# EAGLE board IOT_PCB (EAGLE 9.6.2)
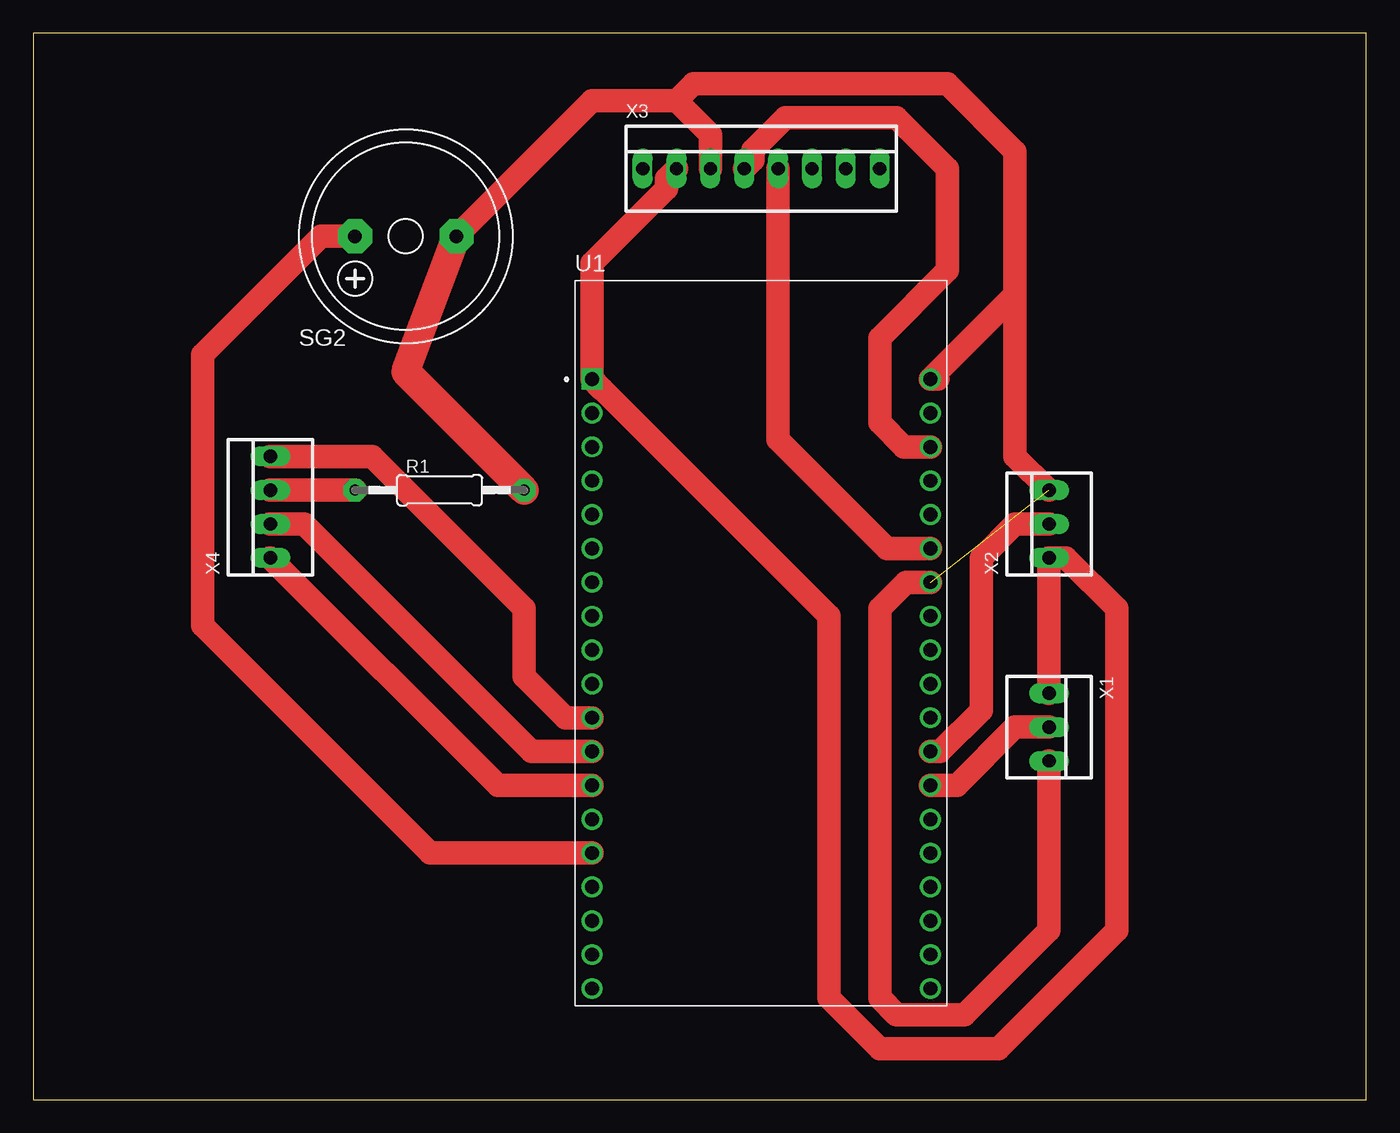
[diagram p0: board, top side]

Size 100 x 80 mm. Coordinates in mm from the lower left corner, seen from the top.
Outline: 0,0 100,0 100,80 0,80 0,0
Copper layers (1*16): Top 0.035mm / dielectric 1.5mm / Bottom 0.035mm
Design rules "default *": minimum track width 20mil, minimum drill 0.35mm, track to track 40mil, track to pad 25mil, pad to pad 6mil, via to via 6mil, smd to smd 6mil, copper to edge 40mil, drill to drill 6mil, minimum pad ring 10mil, minimum via ring 8mil, stop-mask expansion 4mil, vias tented up to drill 0mil, thermal gap 10mil

## Footprints (pad centres in the part's own frame; a part is rotated, then mirrored left to right if it is on the bottom)
0207/12 = drill 0.813 pad 1.676 octagon: 1 -6.35,0; 2 6.35,0
F/HMB = drill 1.016 pad 2.54 octagon: + 3.81,0; - -3.81,0
MODULE_ESP32-DEVKITC-32D = drill 1.04 square: J2-1 -12.7,19.76 | drill 1.04: J2-2 -12.7,17.22; J2-3 -12.7,14.68; J2-4 -12.7,12.14; J2-5 -12.7,9.6; J2-6 -12.7,7.06; J2-7 -12.7,4.52; J2-8 -12.7,1.98; J2-9 -12.7,-0.56; J2-10 -12.7,-3.1; J2-11 -12.7,-5.64; J2-12 -12.7,-8.18; J2-13 -12.7,-10.72; J2-14 -12.7,-13.26; J2-15 -12.7,-15.8; J2-16 -12.7,-18.34; J2-17 -12.7,-20.88; J2-18 -12.7,-23.42; J2-19 -12.7,-25.96; J3-1 12.7,19.76; J3-2 12.7,17.22; J3-3 12.7,14.68; J3-4 12.7,12.14; J3-5 12.7,9.6; J3-6 12.7,7.06; J3-7 12.7,4.52; J3-8 12.7,1.98; J3-9 12.7,-0.56; J3-10 12.7,-3.1; J3-11 12.7,-5.64; J3-12 12.7,-8.18; J3-13 12.7,-10.72; J3-14 12.7,-13.26; J3-15 12.7,-15.8; J3-16 12.7,-18.34; J3-17 12.7,-20.88; J3-18 12.7,-23.42; J3-19 12.7,-25.96
22-23-2031 = drill 1 long: 1 -2.54,0; 2 0,0; 3 2.54,0
22-23-2081 = drill 1 long: 1 -8.89,0; 2 -6.35,0; 3 -3.81,0; 4 -1.27,0; 5 1.27,0; 6 3.81,0; 7 6.35,0; 8 8.89,0
22-23-2041 = drill 1 long: 1 -3.81,0; 2 -1.27,0; 3 1.27,0; 4 3.81,0

## Placement (x,y rotation side)
R1  [0207/12]  30.48,45.72 0 top
SG2  F/HMB  [F/HMB]  27.94,64.77 180 top
U1  ESP32-DEVKITC-32D  [MODULE_ESP32-DEVKITC-32D]  54.61,34.29 0 top
X1  22-23-2031  [22-23-2031]  76.2,27.94 270 top
X2  22-23-2031  [22-23-2031]  76.2,43.18 90 top
X3  22-23-2081  [22-23-2081]  54.61,69.85 0 top
X4  22-23-2041  [22-23-2041]  17.78,44.45 90 top

## Library data of the parts
R1 = adafruit
SG2 = buzzer; OC_FARNELL: unknown; OC_NEWARK: unknown
U1 = ESP32-DEVKITC-32D; AVAILABILITY: In Stock; CHECK_PRICES: https://www.snapeda.com/parts/ESP32-DEVKITC-32D/Espressif+Systems/view-part/?ref=eda; DESCRIPTION: WiFi Development Tools (802.11) ESP32 General Development Kit, ESP32-WROOM-32D on the board; MF: Espressif Systems; MP: ESP32-DEVKITC-32D; PACKAGE: None; PRICE: None; PURCHASE-URL: https://www.snapeda.com/api/url_track_click_mouser/?unipart_id=2777395&manufacturer=Espressif Systems&part_name=ESP32-DEVKITC-32D&search_term=None; SNAPEDA_LINK: https://www.snapeda.com/parts/ESP32-DEVKITC-32D/Espressif+Systems/view-part/?ref=snap
X1 X2 = con-molex; MF: MOLEX; MPN: 22-23-2031; OC_FARNELL: 1462950; OC_NEWARK: 30C0862
X3 = con-molex; MF: MOLEX; MPN: 22-23-2081; OC_FARNELL: 1756826; OC_NEWARK: 01C7592
X4 = con-molex; MF: MOLEX; MPN: 22-23-2041; OC_FARNELL: 1462920; OC_NEWARK: 38C0355

## Nets
3V3: U1.J2-1 X1.1 X2.1 X3.2
BLUE: U1.J2-13 X4.1
BUZZER: SG2.+ U1.J2-15
D4: U1.J3-13 X1.2
DRDY: X3.8
EXT_5V: U1.J2-19
FSYNC: X3.6
GND: R1.2 SG2.- U1.J3-1 U1.J3-7 X1.3 X2.3 X3.3
GND1: U1.J2-14
GREEN: U1.J2-12 X4.2
INTA: X3.7
N$2: R1.1 X4.3
N$4: U1.J3-4
RED: U1.J2-11 X4.4
SCL: U1.J3-3 X3.4
SDA: U1.J3-6 X3.5
TX_GPS: U1.J3-12 X2.2
VCC_IN: X3.1

## Tracks (layer width: path | path; a pad name or v marks a point on that pad's centre or on a via)
3V3
  Top 1.753: X3.2 47.5,69.09 47.5,68.36 41.91,62.77 U1.J2-1 42.64,53.32 42.66,53.32 59.69,36.29 59.69,7.62 63.5,3.81 72.39,3.81 81.28,12.7 81.28,36.83 77.47,40.64 X2.1 X1.1
BLUE
  Top 1.753: X4.1 34.85,23.57 U1.J2-13
BUZZER
  Top 1.753: SG2.+ 21.59,64.77 12.7,55.88 12.7,35.56 29.77,18.49 U1.J2-15 41.2,18.49
D4
  Top 1.753: X1.2 73.66,27.94 69.29,23.57 U1.J3-13
GND  (1 unrouted)
  Top 1.753: SG2.- 41.91,74.93 48.26,74.93 | 48.26,74.93 50.8,72.39 X3.3 | 73.66,60.4 U1.J3-1 67.87,54.05 | 48.26,74.93 49.53,76.2 68.58,76.2 73.66,71.12 73.66,60.4 | 73.66,60.4 73.66,48.26 X2.3 | X1.3 76.2,12.7 69.85,6.35 64.77,6.35 63.5,7.62 63.5,36.83 65.48,38.81 U1.J3-7
  Top 2.159: R1.2 27.94,54.61 SG2.-
GREEN
  Top 1.753: X4.2 20.32,43.18 37.39,26.11 U1.J2-12
N$2
  Top 1.753: X4.3 R1.1
RED
  Top 1.753: U1.J2-11 39.93,28.65 36.83,31.75 36.83,36.83 25.4,48.26 X4.4
SCL
  Top 1.753: X3.4 53.98,70.48 53.98,71.22 56.41,73.66 64.77,73.66 68.58,69.85 68.58,62.23 63.5,57.15 63.5,50.8 65.33,48.97 U1.J3-3
SDA
  Top 1.753: X3.5 55.88,49.53 64.06,41.35 U1.J3-6
TX_GPS
  Top 1.753: X2.2 73.66,43.18 71.12,40.64 71.12,29.21 68.02,26.11 U1.J3-12